# Altium PCB PCB.PcbDoc
Units mil, origin at the board's own origin, x right, y up, seen from the top; angles counter-clockwise.
Board outline 4435 x 2690 mil, 6 copper layers (Top Layer, GND, 5V, 3.3V, Layer 4, Bottom Layer), stack 32.112 mil thick; 43 components, 32 nets, 164 pads, 14 vias.
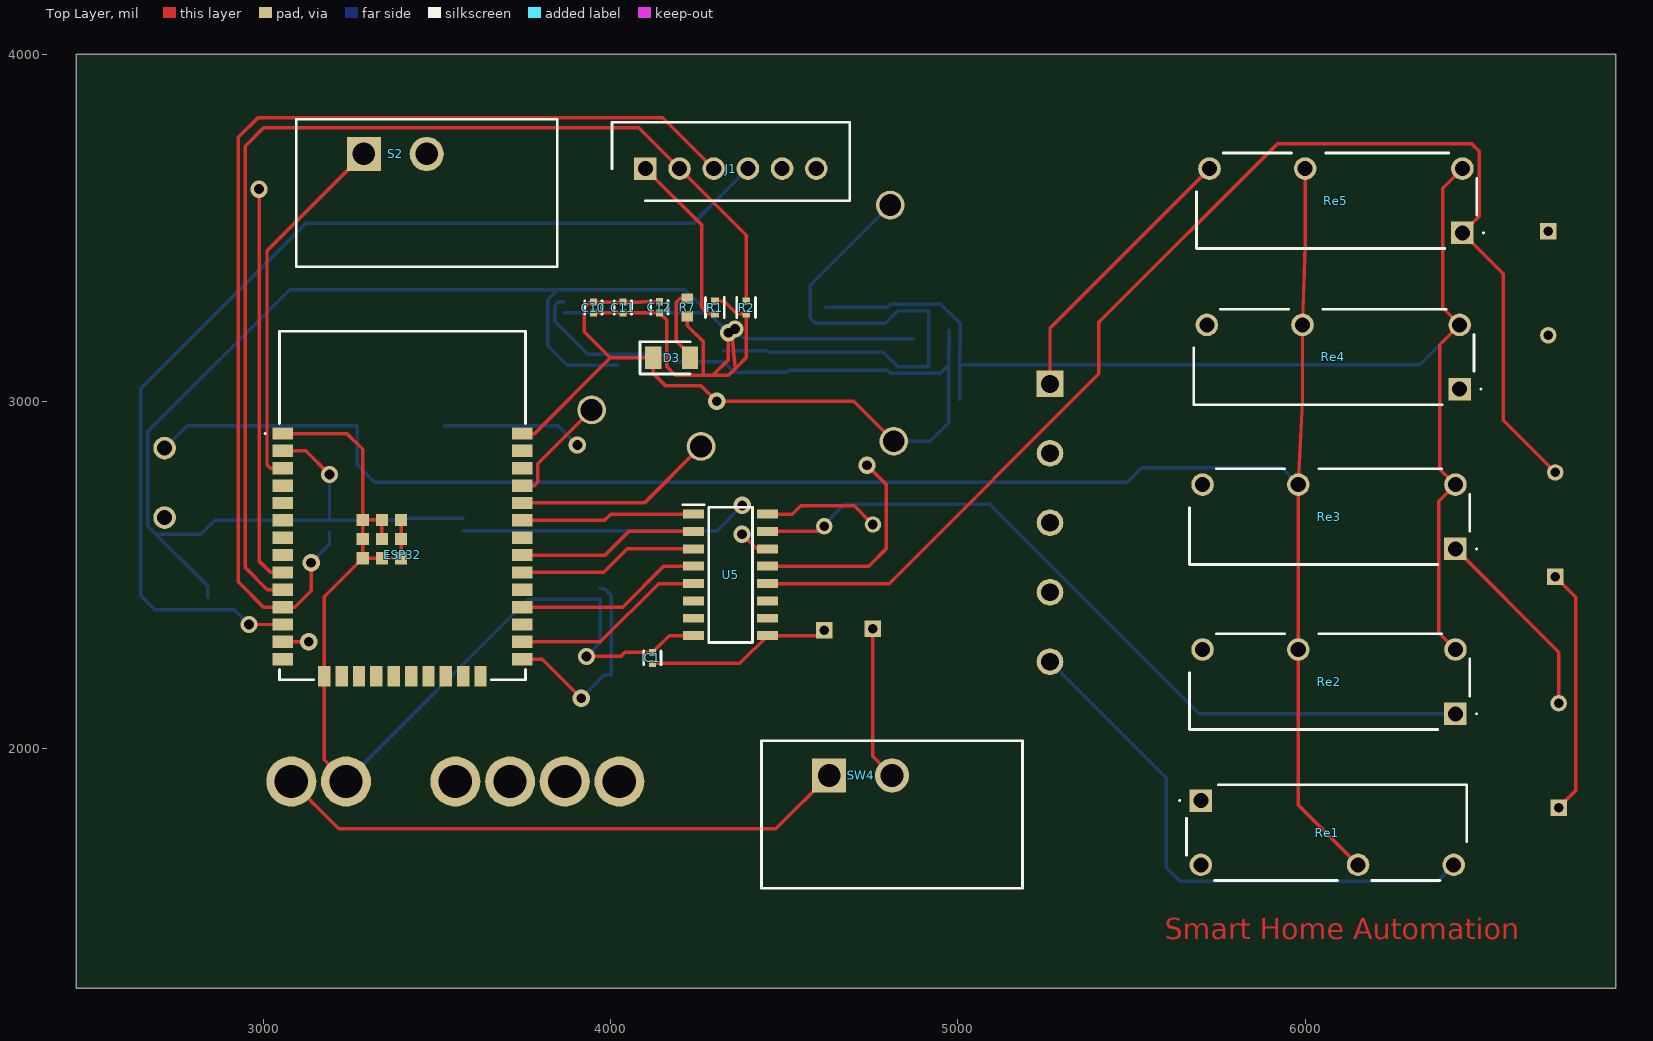
[diagram p0: Top Layer view]
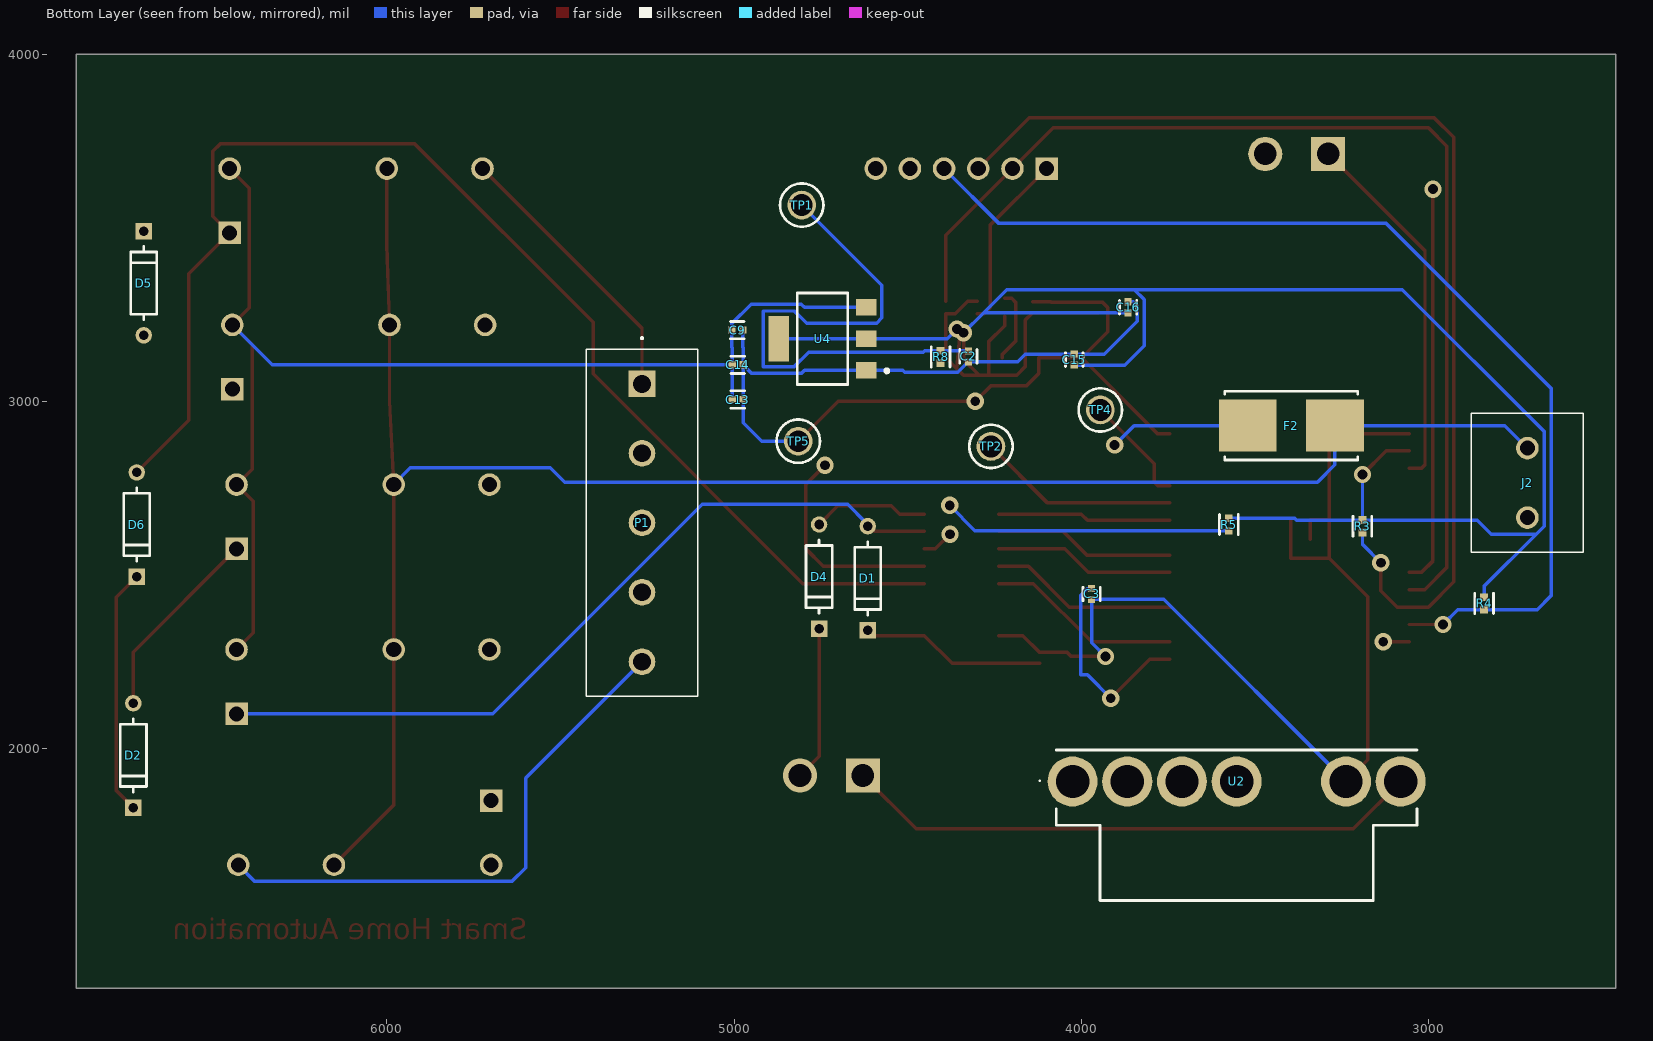
[diagram p1: Bottom Layer view, seen from below]
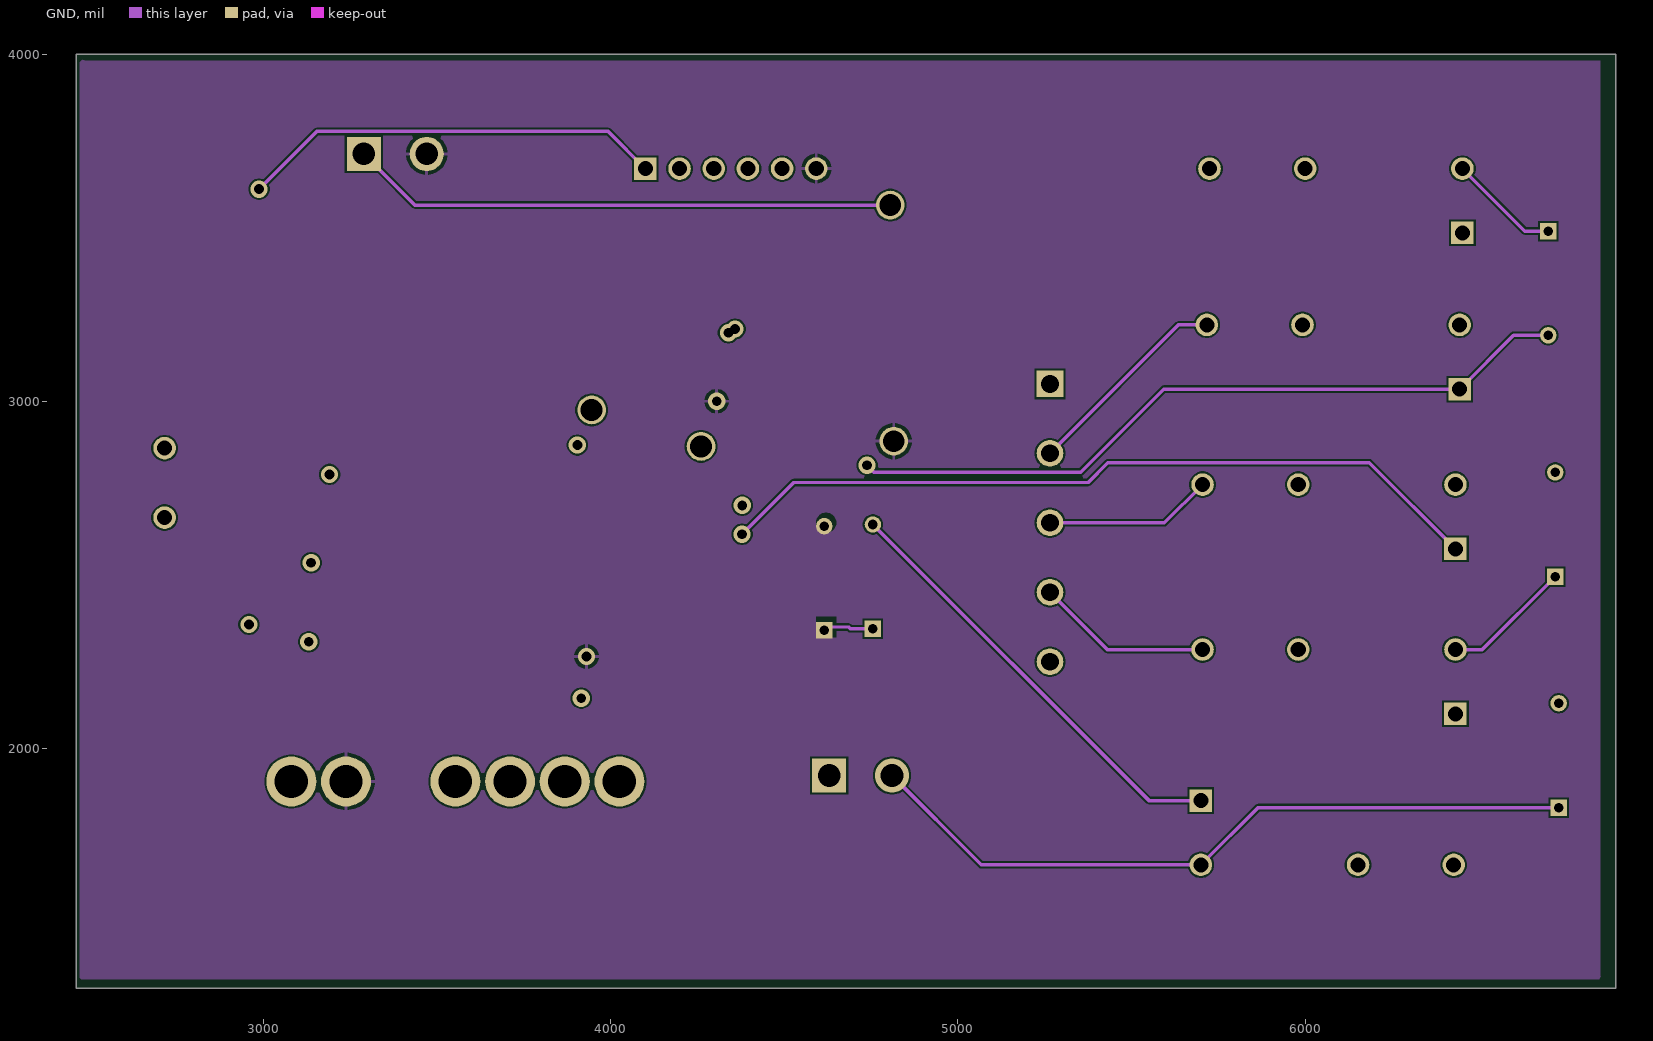
[diagram p2: GND]
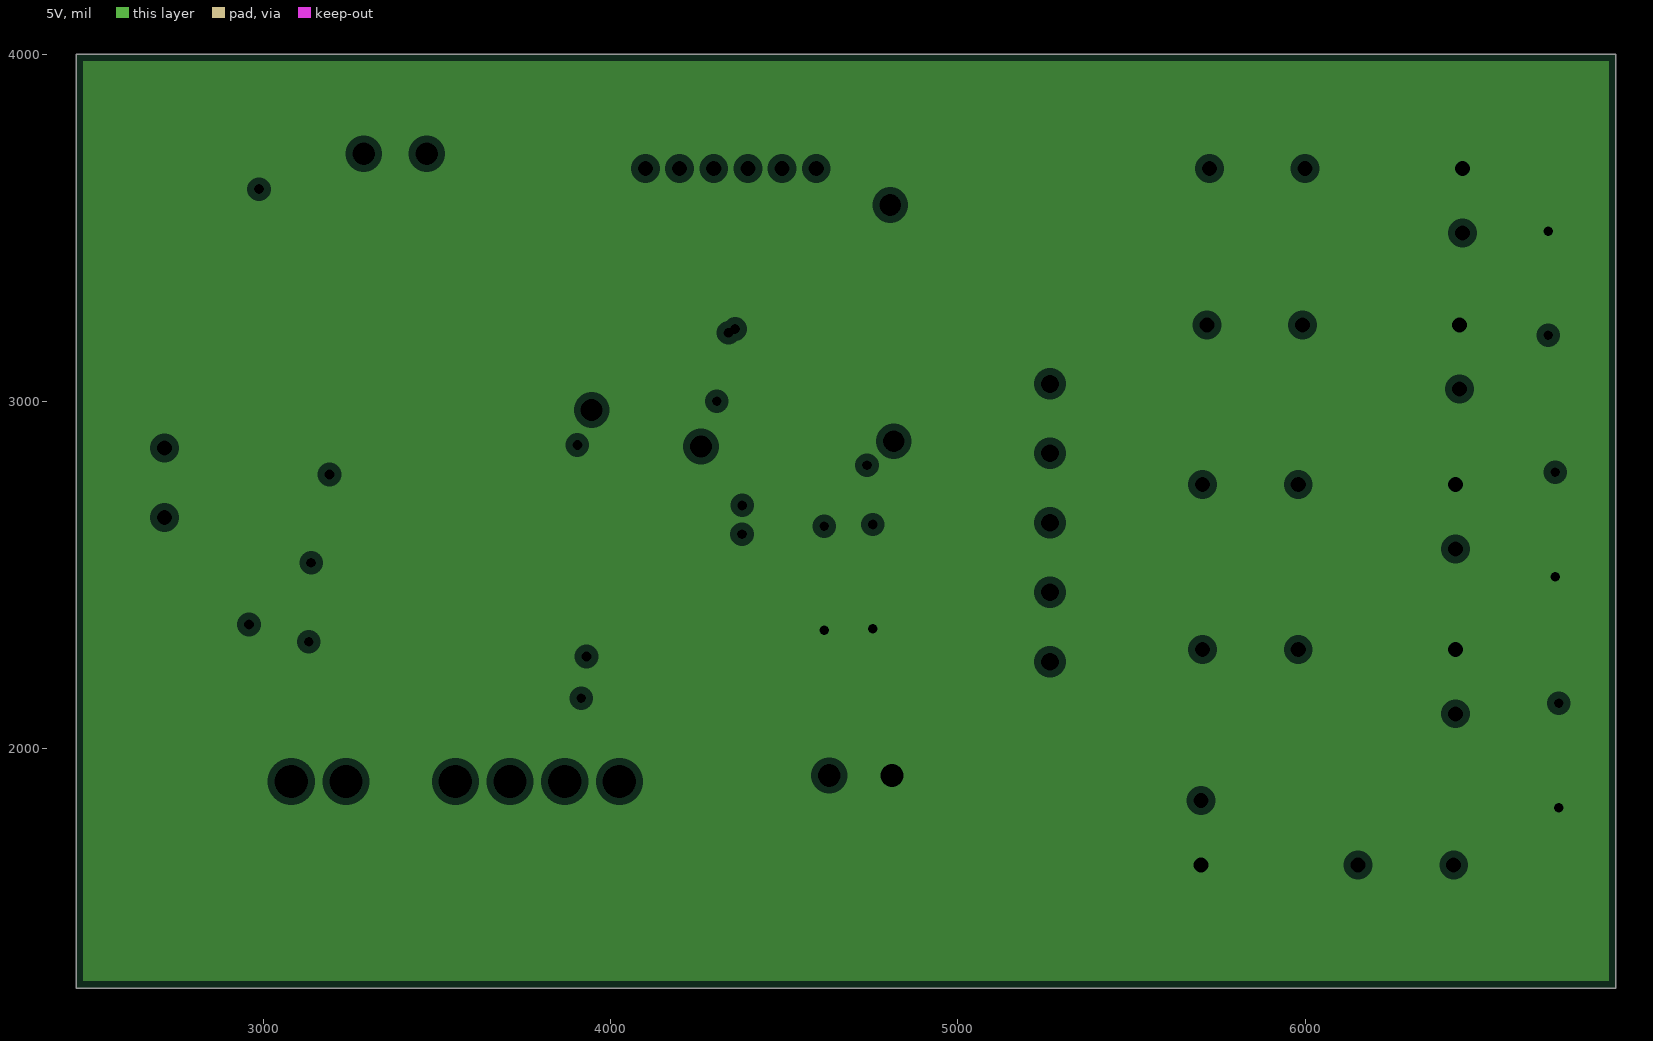
[diagram p3: 5V, clearances drawn from the general rule]
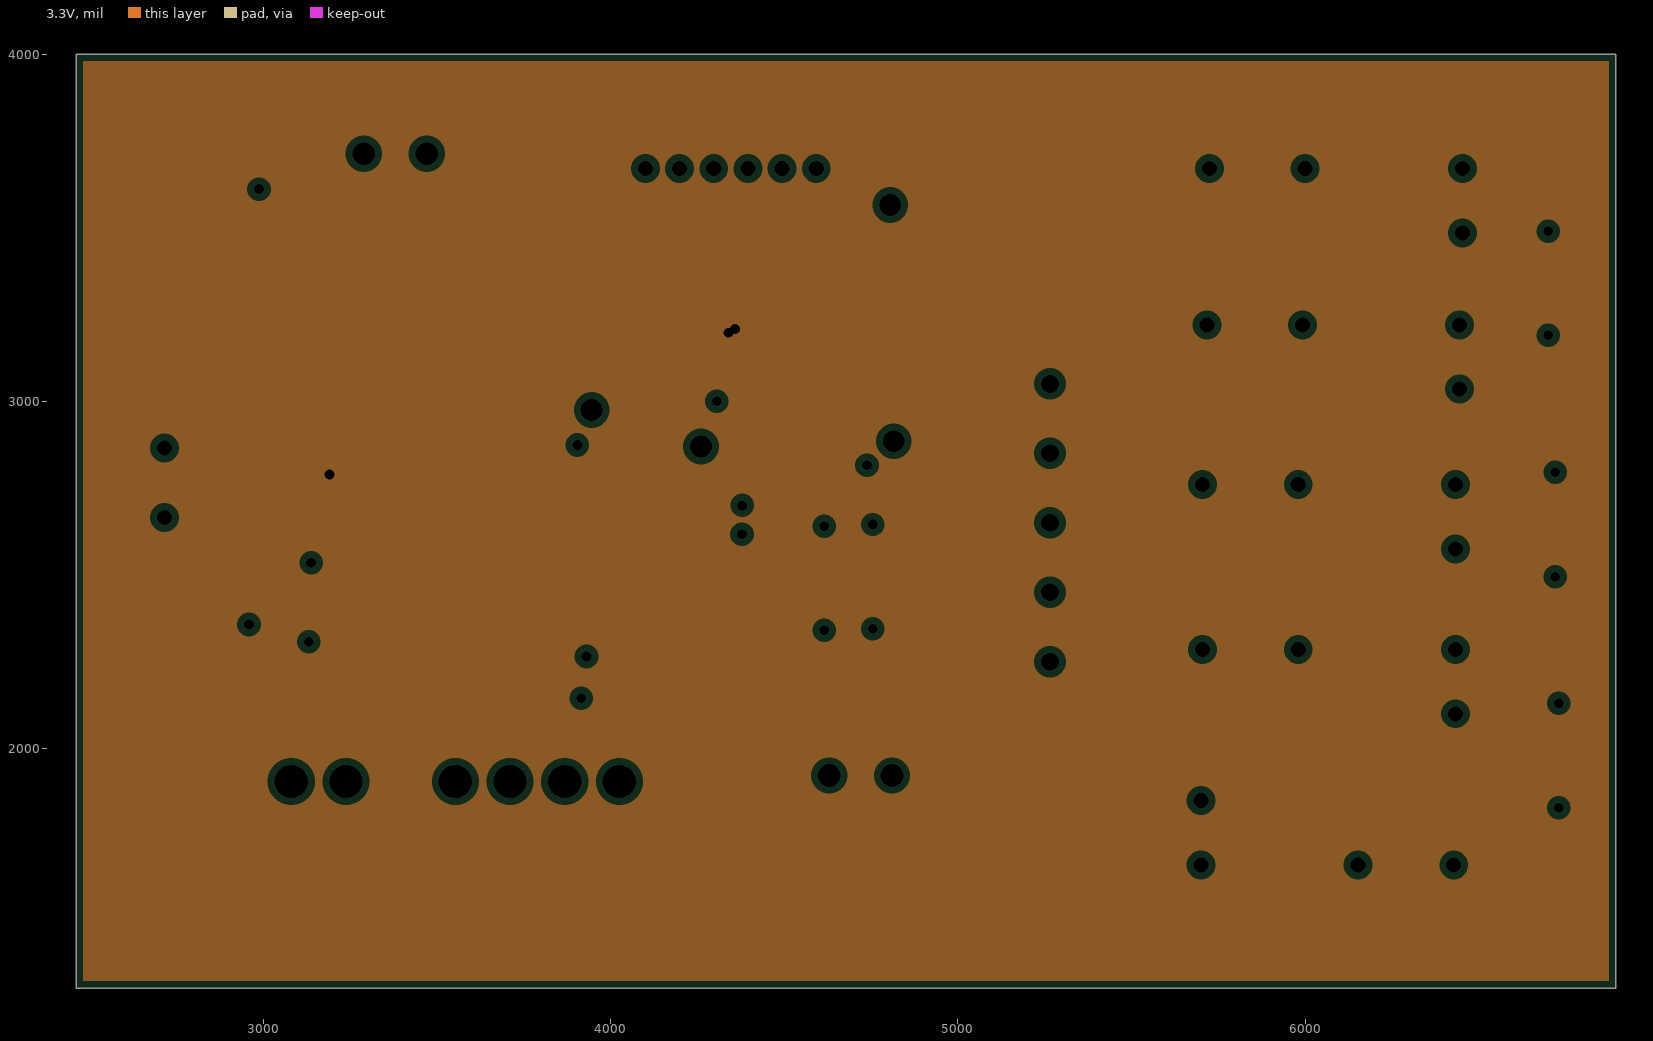
[diagram p4: 3.3V, clearances drawn from the general rule]
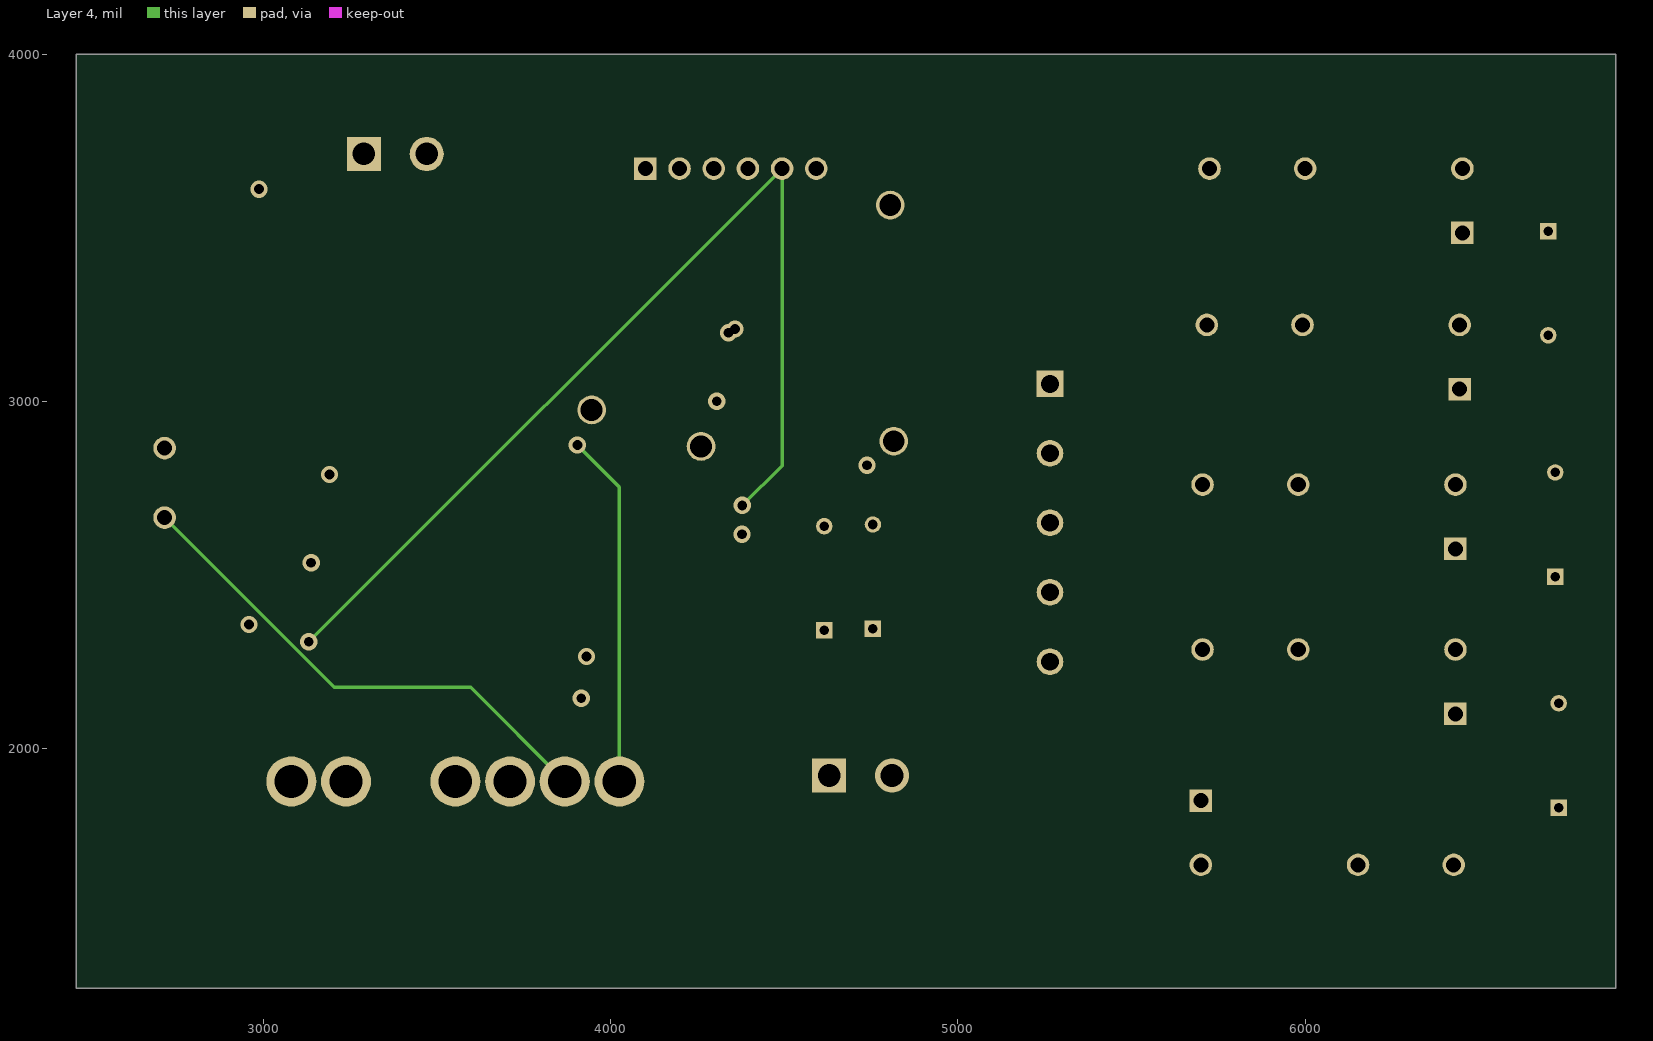
[diagram p5: Layer 4]
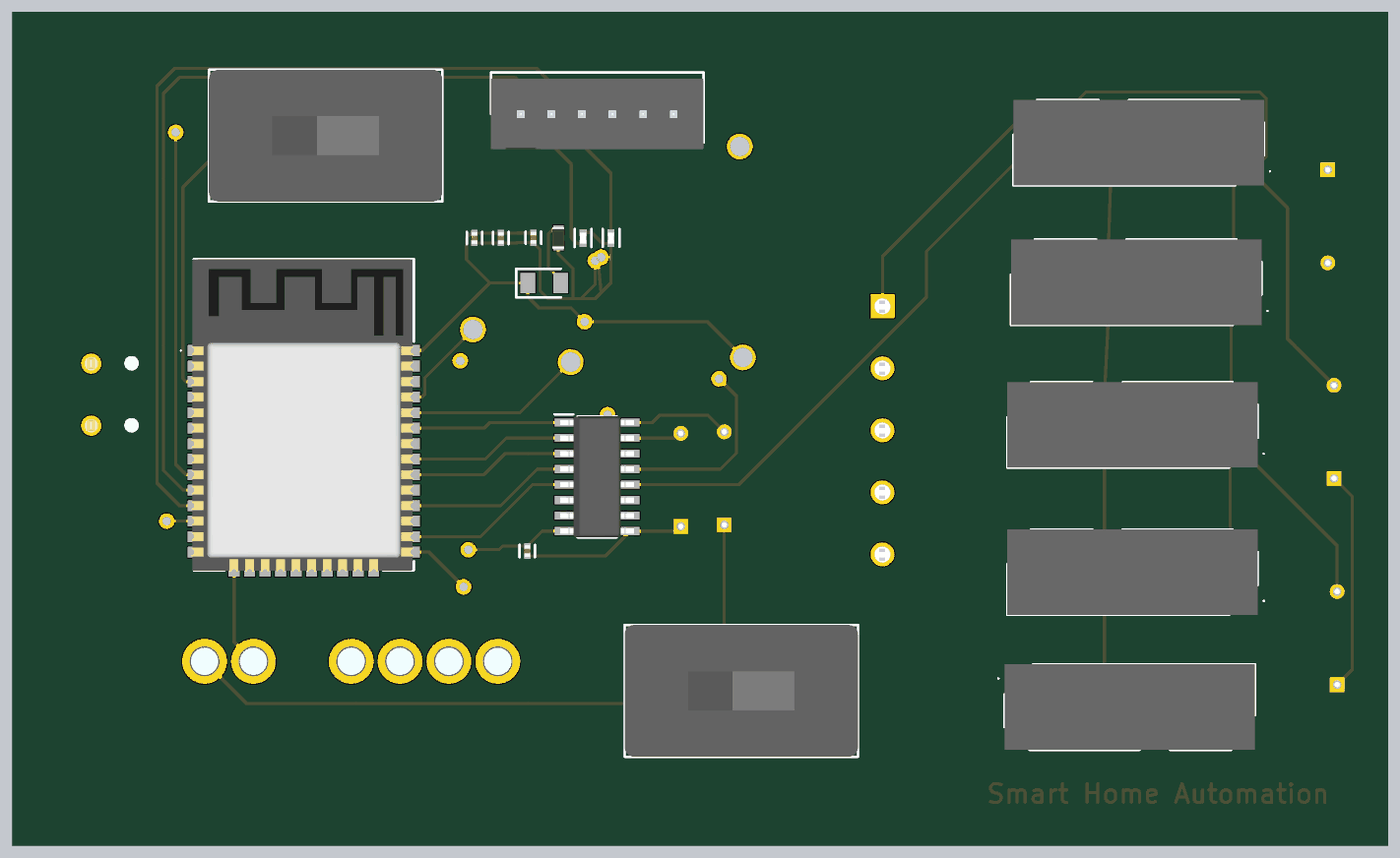
[diagram p6: 3D render of the assembled board from above, using the file's embedded part models]
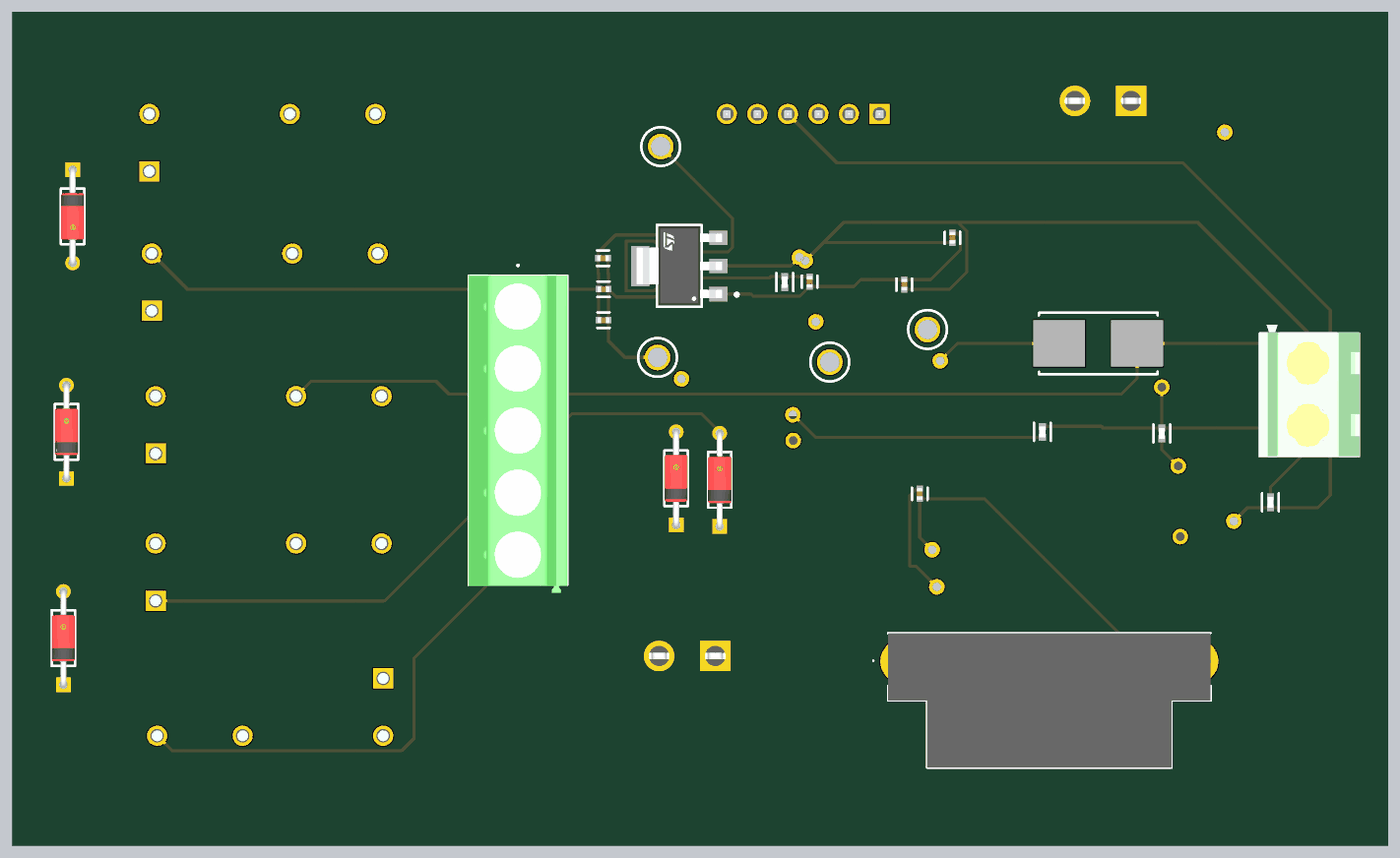
[diagram p7: 3D render of the assembled board from below, using the file's embedded part models]

## Layer stack, top to bottom
Top Solder: solder mask 0.4, Solder Resist, Dk 3.5
Top Layer: signal copper 1.4
Dielectric 4: prepreg 2.8, PP-006, Dk 4.1
GND: signal copper 1.378
Dielectric 2: prepreg 2.8, PP-006, Dk 4.1
5V: plane copper 1.378, net +5V
Dielectric 1: dielectric 12.6, FR-4, Dk 4.8
3.3V: plane copper 1.378, net +3V3
Dielectric 3: prepreg 2.8, PP-006, Dk 4.1
Layer 4: signal copper 1.378
Dielectric 5: prepreg 2.8, PP-006, Dk 4.1
Bottom Layer: signal copper 1.4
Bottom Solder: solder mask 0.4, Solder Resist, Dk 3.5

## Board outline
2460,1310 6895,1310 6895,4000 2460,4000

## Design rules (kind name [scope] priority, off if disabled: settings)
Clearance Clearance_1 [All] p1 off: gap=10 ignorepadtopadclearanceinfootprint=FALSE
Clearance [All] p2 off: gap=5.25 ignorepadtopadclearanceinfootprint=FALSE
HoleToHoleClearance [All] p1 off: gap=10 allowstackedmicrovias=TRUE
MinimumSolderMaskSliver [All] p1 off: minsoldermaskwidth=10
NetAntennae [All] p1 off: netantennaetolerance=0
PlaneClearance [All] p1: clearance=20
PlaneConnect [All] p1: planeconnectstyle=Relief reliefexpansion=20 reliefentries=4 reliefconductorwidth=10 reliefairgap=10
PolygonConnect [All] p1: connectstyle=Relief reliefconductorwidth=10 reliefentries=4 polygonreliefangle="90 Angle" airgapwidth=10
RoutingVias [All] p1: holewidth=28 width=50 viastyle="Through Hole" minholewidth=28 minwidth=50 maxholewidth=28 maxwidth=50
ShortCircuit [All] p1 off: allowed=FALSE
SilkToSolderMaskClearance SilkToSolderMaskClearance_1 [IsPad] p1 off: minsilkscreentomaskgap=10 clearancetoexposedcopper=TRUE
SilkToSolderMaskClearance [IsPad] p2 off: minsilkscreentomaskgap=10 clearancetoexposedcopper=TRUE
SolderMaskExpansion [All] p1: expansion=4 istentingtop=FALSE
SupplyNets "Schematic Supply Nets_2" [InNet('GND')] p1: voltage=0.000
SupplyNets "Schematic Supply Nets_1" [InNet('+3V3')] p2: voltage=0.000
SupplyNets "Schematic Supply Nets" [InNet('+5V')] p3: voltage=0.000
UnRoutedNet [All] p1 off:
UnpouredPolygon [All] p1 off:
Width [All] p1: maxlimit=10 minlimit=10 preferedwidth=10
21 further rules are at their usual default settings.

## Components (designator, comment, footprint, x,y, rotation, side; value= is the part's Value field where it differs from the comment)
C1 "C0402C104K8PACTU" FP-C0402-BB-MFG 4120,2260.75 r90 top value="1 μF"
C2 "C0402C104K8PACTU" FP-C0402-BB-MFG 4325,3129.25 r270 bottom value="0.1 μF"
C3 "C0402C104K8PACTU" FP-C0402-BB-MFG 3970,2445 r270 bottom value="0.1 μF"
C9 "C0402C104K8PACTU" FP-C0402-BB-MFG 4990.75,3205 r180 bottom value="10 μF"
C10 "C0402C104K8PACTU" FP-C0402-BB-MFG 3950,3270 r90 top value="10 μF"
C11 "C0402C104K8PACTU" FP-C0402-BB-MFG 4035,3270 r90 top value="1 μF"
C12 "C0402C104K8PACTU" FP-C0402-BB-MFG 4140,3270.75 r90 top value="0.10 μF"
C13 "C0402C104K8PACTU" FP-C0402-BB-MFG 4989.25,3005 r180 bottom value="1 μF"
C14 "C0402C104K8PACTU" FP-C0402-BB-MFG 4989.25,3105 r180 bottom value="0.10 μF"
C15 "C0402C104K8PACTU" FP-C0402-BB-MFG 4020,3120 r90 bottom value="22 μF"
C16 "C0402C104K8PACTU" FP-C0402-BB-MFG 3865,3270.75 r90 bottom value="0.1 μF"
D1 "1N4148" FP-017AG-MFG 4615,2490.12 r90 bottom
D2 "1N4148" FP-017AG-MFG 6730,1980 r90 bottom
D3 "597-3111-407F" LEDC3015X150N 4175,3125 r0 top
D4 "1N4148" FP-017AG-MFG 4755,2495 r90 bottom
D5 "1N4148" FP-017AG-MFG 6700,3340 r270 bottom
D6 "1N4148" FP-017AG-MFG 6720,2645 r90 bottom
ESP32 "ESP32-WROOM-32E-N4" ESP32WROOM32EN4 3400,2700 r0 top
F2 "0154005.DRT" LFUS-154_V 3395,2930 r0 bottom
J1 "B6B-XH-A_LF__SN_" SHDR6W64P0X250_1X6_1740X575X700P 4099.72,3670 r0 top
J2 "282837-2" 2828372 2715,2665 r90 bottom
P1 "1729157" 1729157 5265,3050 r270 bottom
R1 "CRCW040210K0JNED" FP-CRCW0402-e3-IPC_B 4300,3270 r270 top
R2 "CRCW040210K0JNED" FP-CRCW0402-e3-IPC_B 4390,3270 r90 top
R3 "CRCW040210K0JNED" FP-CRCW0402-e3-IPC_B 3190,2640 r270 bottom
R4 "CRCW040210K0JNED" FP-CRCW0402-e3-IPC_B 2840,2417.8 r270 bottom
R5 "CRCW040210K0JNED" FP-CRCW0402-e3-IPC_B 3575,2645 r270 bottom
R7 "ERJ-3EKF3300V" RESC1608X55X30LL15T15 4220,3270.59 r270 top
R8 "CRCW040210K0JNED" FP-CRCW0402-e3-IPC_B 4405,3127.8 r90 bottom
Re1 "HF46F-G_5-HS1T" HF46FG5HS1T 5699.41,1850.04 r0 top
Re2 "HF46F-G_5-HS1T" HF46FG5HS1T 6432.76,2099.96 r180 top
Re3 "HF46F-G_5-HS1T" HF46FG5HS1T 6432.76,2574.96 r180 top
Re4 "HF46F-G_5-HS1T" HF46FG5HS1T 6445,3035 r180 top
Re5 "HF46F-G_5-HS1T" HF46FG5HS1T 6452.76,3484.96 r180 top
S2 "L101011MS02Q" FP-L101011MS02Q-MFG 3470,3600 r270 top
SW4 "L101011MS02Q" FP-L101011MS02Q-MFG 4810,1810 r270 top
TP1 "TEST" KSTN-5012_V 4805,3565 r180 bottom
TP2 "TEST" KSTN-5012_V 4260,2870 r180 bottom
TP4 "TEST" KSTN-5012_V 3945,2975 r180 bottom
TP5 "TEST" KSTN-5012_V 4815,2885 r180 bottom
U2 "LS05-13B05R3" LS0513B05R3 4024.96,1905 r180 bottom
U4 "LD1117S33CTR" FP-SOT-223-0046067_14-MFG 4745,3180 r0 bottom
U5 "ULN2003LVDR" SOIC127P600X175-16N 4345,2500 r0 top

## Footprints (in the part's own frame and the unit in brackets; to place one, negate y for a bottom-side part, rotate by r counter-clockwise, add the part's x,y. Pads: shape width x height; smd on the part's side, far side on the other; paste and mask are expansions set on the pad)
1729157 [mm]
  rect 1.95x1.95 hole 1.3: 1(0,0)
  round 1.95 hole 1.3: 2(5.08,0) 3(10.16,0) 4(15.24,0) 5(20.32,0)
  silkscreen extent -3.4,-4.08 22.86,4.08, body extent -2.51,-4.03 23.46,4.07, height 10.52
2828372 [mm]
  round 1.65 hole 1.1: 1(0,0) 2(5.08,0)
  silkscreen extent -2.54,-4.1 7.62,4.1, body extent -2.51,-4.11 8.25,4.09, height 9.84
ESP32WROOM32EN4 [mm]
  rect 1.5x0.9 smd: 1(-8.75,5.26) 2(-8.75,3.99) 3(-8.75,2.72) 4(-8.75,1.45) 5(-8.75,0.18) 6(-8.75,-1.09) 7(-8.75,-2.36) 8(-8.75,-3.63) 9(-8.75,-4.9) 10(-8.75,-6.17) 11(-8.75,-7.44) 12(-8.75,-8.71) 13(-8.75,-9.98) 14(-8.75,-11.25) 25(8.75,-11.25) 26(8.75,-9.98) 27(8.75,-8.71) 28(8.75,-7.44) 29(8.75,-6.17) 30(8.75,-4.9) 31(8.75,-3.63) 32(8.75,-2.36) 33(8.75,-1.09) 34(8.75,0.18) 35(8.75,1.45) 36(8.75,2.72) 37(8.75,3.99) 38(8.75,5.26)
  rect 0.9x1.5 smd: 15(-5.715,-12.5) 16(-4.445,-12.5) 17(-3.175,-12.5) 18(-1.905,-12.5) 19(-0.635,-12.5) 20(0.635,-12.5) 21(1.905,-12.5) 22(3.175,-12.5) 23(4.445,-12.5) 24(5.715,-12.5)
  rect 0.9x0.9 smd: 39(-2.9,-1.06) 40(-2.9,-2.46) 41(-2.9,-3.86) 42(-1.5,-3.86) 43(-0.1,-3.86) 44(-0.1,-2.46) 45(-0.1,-1.06) 46(-1.5,-1.06) 47(-1.5,-2.46)
  silkscreen extent -10.1,-12.75 9,12.75, body extent -9.21,-12.84 8.98,12.75, height 3.2
FP-017AG-MFG [mm]
  rect 1.2x1.2 hole 0.7 paste-2539.97 mask+0: 1(-3.813,0)
  round 1.2 hole 0.7 paste-2539.97 mask+0: 2(3.813,0)
  silkscreen extent -2.68,-0.95 2.68,0.95, body extent -4.06,-0.95 4.06,0.95, height 1.91
FP-C0402-BB-MFG [mm]
  rect 0.52x0.52 smd paste+0 mask+0: 1(-0.4,0) 2(0.4,0)
  silkscreen extent -0.5,-0.64 0.5,0.64, body extent -0.5,-0.25 0.5,0.25, height 0.55
FP-CRCW0402-e3-IPC_B [mil]
  rect 22.37x22.54 smd paste+0 mask+0: 1(-17.8,0) 2(17.8,0)
  silkscreen extent -29,-27 29,27, body extent -35,-17 35,17, height 10
FP-L101011MS02Q-MFG [mm]
  rect 2.5x2.5 hole 1.65 paste-2539.97 mask+0: 1(-2.85,-4.6)
  round 2.5 hole 1.65 paste-2539.97 mask+0: 2(-2.85,0)
  silkscreen extent -5.39,-9.55 5.4,9.55, body extent -5.4,-9.55 5.4,9.55, height 14.17
FP-SOT-223-0046067_14-MFG [mm]
  rect 1.5x1.2 smd paste+0 mask+0: 1(-3.2,2.3) 2(-3.2,0) 3(-3.2,-2.3)
  rect 1.5x3.3 smd paste+0 mask+0: 4(3.2,0)
  silkscreen extent -4.82,-3.35 1.85,3.35, body extent -3.5,-3.25 3.5,3.25, height 1.9
HF46FG5HS1T [mm]
  rect 1.65x1.65 hole 1.1: 1(0,0)
  round 1.65 hole 1.1: 2(0,-4.7) 3(11.5,-4.7) 4(18.5,-4.7)
  silkscreen extent -1.6,-5.85 19.45,1.15, body extent -1.05,-5.85 19.45,1.15, height 15.7
KSTN-5012_V [mm] "Test Point, Dia 3.17mm"
  round 2.1 hole 1.6: 1(0,0)
  silkscreen extent -1.59,-1.58 1.59,1.58, body extent -1.58,-1.59 1.58,1.59, height 8.12
LEDC3015X150N [mm]
  rect 1.2x1.65 smd: 1(-1.35,0) 2(1.35,0)
  silkscreen extent -2.3,-1.18 1.35,1.18
LFUS-154_V [mm] "SMD, 2-Leads, Body 9.73x5.03mm"
  rect 4.24x3.81 smd: 1(-3.185,0) 2(3.185,0)
  silkscreen extent -4.87,-2.52 4.87,2.51, body extent -4.86,-2.51 4.86,2.51, height 3.81
LS0513B05R3 [mm]
  round 3.66 hole 2.44: 1(0,0) 2(4,0) 3(8,0) 4(12,0) 5(20,0) 6(24,0)
  silkscreen extent -2.45,-8.7 25.2,2.3, body extent -1.2,-8.7 25.2,2.3, height 15.83
RESC1608X55X30LL15T15 [mm] "Chip Resistor, 2-Leads, Body 1.75x0.95mm, IPC High Density"
  rect 0.75x0.85 smd: 1(-0.65,0) 2(0.65,0)
  body extent -0.87,-0.48 0.87,0.48, height 0.55
SHDR6W64P0X250_1X6_1740X575X700P [mm]
  rect 1.65x1.65 hole 1.1: 1(0,0)
  round 1.65 hole 1.1: 2(2.5,0) 3(5,0) 4(7.5,0) 5(10,0) 6(12.5,0)
  silkscreen extent -2.45,-2.35 14.95,3.4, body extent -2.45,-2.88 14.95,2.88, height 7
SOIC127P600X175-16N [mm]
  rect 1.525x0.65 smd: 1(-2.712,4.445) 2(-2.712,3.175) 3(-2.712,1.905) 4(-2.712,0.635) 5(-2.712,-0.635) 6(-2.712,-1.905) 7(-2.712,-3.175) 8(-2.712,-4.445) 9(2.712,-4.445) 10(2.712,-3.175) 11(2.712,-1.905) 12(2.712,-0.635) 13(2.712,0.635) 14(2.712,1.905) 15(2.712,3.175) 16(2.712,4.445)
  silkscreen extent -3.47,-4.95 1.6,5.12, body extent -3.01,-4.95 3.01,4.95, height 1.75

## Part data
C1 C13: library part CMP-2008-02046-2, "CAP CER 0.1UF 10V X5R 0402", Capacitance=1uF, Manufacturer=Kemet, Package=C0402-BB, Temperature="-55°C to +125°C", Temperature Characteristic=X5R, Temperature Coefficient=15%, Temperature Range High=+125°C, Temperature Range Low=-55°C, Tolerance=0.1, Voltage Rating="10 V", Automotive=No, Category=Cap, ComponentLink2Description=Datasheet, ComponentLink2URL=https://content.kemet.com/datasheets/KEM_C1002_X7R_SMD.pdf, Device Class L1="Passive Components", Device Class L2=Capacitors, Device Class L3="Ceramic Capacitors", Digikey Description="CAP CER 0.1UF 10V X5R 0402", Height=0.55mm, Ipc Land Pattern Name=CAPC10050X50, Lead Free=Yes, Manufacturer Part Number=C0402C104K8PACTU, Material=Ceramic, Mouser Description="Capacitor 100 nF 10 VDC 0402", Octopart=https://octopart.com/c0402c104k8pactu-kemet-140039, RoHS=TRUE
C2 C3 C16: library part CMP-2008-02046-2, "CAP CER 0.1UF 10V X5R 0402", Capacitance="0.1 μF", Manufacturer=Kemet, Package=C0402-BB, Temperature="-55°C to +125°C", Temperature Characteristic=X5R, Temperature Coefficient=15%, Temperature Range High=+125°C, Temperature Range Low=-55°C, Tolerance=0.1, Voltage Rating="10 V", Automotive=No, Category=Cap, ComponentLink2Description=Datasheet, ComponentLink2URL=https://content.kemet.com/datasheets/KEM_C1002_X7R_SMD.pdf, Device Class L1="Passive Components", Device Class L2=Capacitors, Device Class L3="Ceramic Capacitors", Digikey Description="CAP CER 0.1UF 10V X5R 0402", Height=0.55mm, Ipc Land Pattern Name=CAPC10050X50, Lead Free=Yes, Manufacturer Part Number=C0402C104K8PACTU, Material=Ceramic, Mouser Description="Capacitor 100 nF 10 VDC 0402", Octopart=https://octopart.com/c0402c104k8pactu-kemet-140039, RoHS=TRUE
C9 C10: library part CMP-2008-02046-2, "CAP CER 0.1UF 10V X5R 0402", Capacitance="10 μF", Manufacturer=Kemet, Package=C0402-BB, Temperature="-55°C to +125°C", Temperature Characteristic=X5R, Temperature Coefficient=15%, Temperature Range High=+125°C, Temperature Range Low=-55°C, Tolerance=0.1, Voltage Rating="10 V", Automotive=No, Category=Cap, ComponentLink2Description=Datasheet, ComponentLink2URL=https://content.kemet.com/datasheets/KEM_C1002_X7R_SMD.pdf, Device Class L1="Passive Components", Device Class L2=Capacitors, Device Class L3="Ceramic Capacitors", Digikey Description="CAP CER 0.1UF 10V X5R 0402", Height=0.55mm, Ipc Land Pattern Name=CAPC10050X50, Lead Free=Yes, Manufacturer Part Number=C0402C104K8PACTU, Material=Ceramic, Mouser Description="Capacitor 100 nF 10 VDC 0402", Octopart=https://octopart.com/c0402c104k8pactu-kemet-140039, RoHS=TRUE
C11: library part CMP-2008-02046-2, "CAP CER 0.1UF 10V X5R 0402", Capacitance="1 μF", Manufacturer=Kemet, Package=C0402-BB, Temperature="-55°C to +125°C", Temperature Characteristic=X5R, Temperature Coefficient=15%, Temperature Range High=+125°C, Temperature Range Low=-55°C, Tolerance=0.1, Voltage Rating="10 V", Automotive=No, Category=Cap, ComponentLink2Description=Datasheet, ComponentLink2URL=https://content.kemet.com/datasheets/KEM_C1002_X7R_SMD.pdf, Device Class L1="Passive Components", Device Class L2=Capacitors, Device Class L3="Ceramic Capacitors", Digikey Description="CAP CER 0.1UF 10V X5R 0402", Height=0.55mm, Ipc Land Pattern Name=CAPC10050X50, Lead Free=Yes, Manufacturer Part Number=C0402C104K8PACTU, Material=Ceramic, Mouser Description="Capacitor 100 nF 10 VDC 0402", Octopart=https://octopart.com/c0402c104k8pactu-kemet-140039, RoHS=TRUE
C12 C14: library part CMP-2008-02046-2, "CAP CER 0.1UF 10V X5R 0402", Capacitance="0.10 μF", Manufacturer=Kemet, Package=C0402-BB, Temperature="-55°C to +125°C", Temperature Characteristic=X5R, Temperature Coefficient=15%, Temperature Range High=+125°C, Temperature Range Low=-55°C, Tolerance=0.1, Voltage Rating="10 V", Automotive=No, Category=Cap, ComponentLink2Description=Datasheet, ComponentLink2URL=https://content.kemet.com/datasheets/KEM_C1002_X7R_SMD.pdf, Device Class L1="Passive Components", Device Class L2=Capacitors, Device Class L3="Ceramic Capacitors", Digikey Description="CAP CER 0.1UF 10V X5R 0402", Height=0.55mm, Ipc Land Pattern Name=CAPC10050X50, Lead Free=Yes, Manufacturer Part Number=C0402C104K8PACTU, Material=Ceramic, Mouser Description="Capacitor 100 nF 10 VDC 0402", Octopart=https://octopart.com/c0402c104k8pactu-kemet-140039, RoHS=TRUE
C15: library part CMP-2008-02046-2, "CAP CER 0.1UF 10V X5R 0402", Capacitance="22 μF", Manufacturer=Kemet, Package=C0402-BB, Temperature="-55°C to +125°C", Temperature Characteristic=X5R, Temperature Coefficient=15%, Temperature Range High=+125°C, Temperature Range Low=-55°C, Tolerance=0.1, Voltage Rating="10 V", Automotive=No, Category=Cap, ComponentLink2Description=Datasheet, ComponentLink2URL=https://content.kemet.com/datasheets/KEM_C1002_X7R_SMD.pdf, Device Class L1="Passive Components", Device Class L2=Capacitors, Device Class L3="Ceramic Capacitors", Digikey Description="CAP CER 0.1UF 10V X5R 0402", Height=0.55mm, Ipc Land Pattern Name=CAPC10050X50, Lead Free=Yes, Manufacturer Part Number=C0402C104K8PACTU, Material=Ceramic, Mouser Description="Capacitor 100 nF 10 VDC 0402", Octopart=https://octopart.com/c0402c104k8pactu-kemet-140039, RoHS=TRUE
D1 D2 D4 D5 D6: library part CMP-07163-000046-1, "DIODE GEN PURP 100V 200MA DO35", Average Rectified Current=200mA, Capacitance=4pF, Case/Package=DO-35, Current=4A, Forward Current=300mA, Forward Voltage=1V, Max Forward Surge Current (Ifsm)=1A, Max Operating Temperature=175°C, Max Power Dissipation=500mW, Max Repetitive Reverse Voltage (Vrrm)=100V, Max Reverse Current=5uA, Min Operating Temperature=-65°C, Package Quantity=2000, Contact Plating=Tin, Current Rating=200mA, Diameter=1.91mm, Element Configuration=Single, Height=4.56mm, Lead Free="Lead Free", Length=4.56mm, Max Reverse Voltage (DC)=100V, Max Surge Current=4A, Mount="Through Hole", Number of Pins=2, Output Current=200mA, Outside Diameter=1.85mm, Packaging=Bulk, Peak Non-Repetitive Surge Current=4A, Polarity=Standard, Power Dissipation=500mW, Radiation Hardening=No, REACH SVHC="No SVHC", Recovery Time=4ns, Reverse Recovery Time=4ns, Reverse Voltage=100V, Series=-, Voltage=100V, Voltage Rating (DC)=100V, Weight=0.01lb, Width=1.91mm
D3: "LED", Manufacturer_Name=Dialight, Mouser Part Number=645-597-3111-407F, Arrow Part Number=597-3111-407F, Arrow Price/Stock=https://www.arrow.com/en/products/597-3111-407f/dialight?utm_currency=USD&region=nac, Datasheet Link=https://datasheet.datasheetarchive.com/originals/distributors/Datasheets-DGA13/1153722.pdf, Height=1.5mm, Manufacturer_Part_Number=597-3111-407F, Mouser Price/Stock=https://www.mouser.co.uk/ProductDetail/Dialight/597-3111-407F?qs=DVhSRDYZfLqO0KXLkTIRsA%3D%3D
ESP32: "Integrated Circuit", Manufacturer_Name="Espressif Systems", Mouser Part Number=356-ESP32WRM32E132PH, Datasheet Link=https://www.espressif.com/sites/default/files/documentation/esp32-wroom-32e_esp32-wroom-32ue_datasheet_en.pdf, Height=3.25mm, Manufacturer_Part_Number=ESP32-WROOM-32E-N4, Mouser Price/Stock=https://www.mouser.co.uk/ProductDetail/Espressif-Systems/ESP32-WROOM-32E-N4?qs=Li%252BoUPsLEnsPzTWsi%252BRMgQ%3D%3D
F2: library part CMP-2000-07571-1, "Fuse and Holder Combination, 125 V, 5 A, -55 to 125 degC, 2-Pin SMD, RoHS, Tape and Reel", Case\/Package=SMD/SMT, Colour=White, Current Rating=5A, DC Cold Resistance=13.6mOhm, Flammability Rating=UL94V-0, Manufacturer=Littelfuse, Max Operating Temperature=125degC, Min Operating Temperature=-55degC, Package Description="2-Pin Surface Mount Device, Body 9.73 x 5.03 mm", Package Quantity=1500, Package Reference=154, Power Dissipation=125W, Voltage Rating=125V, Approvals=PSE, Body Material=Thermoplastic, Datasheet URL=http://www.littelfuse.com/~/media/electronics/datasheets/fuses/littelfuse_fuse_154_154t_154l_154tl_datasheet.pdf.pdf, Datasheet Version=06/2017, Depth=5.03mm, Fuse Current=5A, Fuse Type=BoardMount(CartridgeStyleExcluded), Height=3.81mm, Lead Free=LeadFree, Length=9.73mm, Manufacturer URL=http://www.littelfuse.com/, Mount=Holder, Mounting Technology=SurfaceMount, Number of Pins=2, Packaging=TapeandReel, Radiation Hardening=No, REACH SVHC=Unknown, RoHSCompliant=True, Terminal Material=Copper, Termination=SMD/SMT, Voltage Rating (AC)=125V, Voltage Rating (DC)=125V, Width=5.03mm, Working Voltage=125V
J1: "Connector", Arrow Part Number=B6B-XH-A(LF)(SN), Manufacturer_Name="JST (JAPAN SOLDERLESS TERMINALS)", Mouser Part Number=306-B6BXHALFSN, Arrow Price/Stock=https://www.arrow.com/en/products/b6b-xh-a-lf-sn/jst-manufacturing?utm_currency=USD&region=europe, Datasheet Link=https://datasheet.lcsc.com/szlcsc/JST-Sales-America-B6B-XH-A-LF-SN_C144397.pdf, Height=7mm, Manufacturer_Part_Number=B6B-XH-A(LF)(SN), Mouser Price/Stock=https://www.mouser.co.uk/ProductDetail/JST-Commercial/B6B-XH-ALFSN?qs=cdbOS8ANM9AKmMmofXbwlw%3D%3D
J2: "Connector", Manufacturer_Name="TE Connectivity", Mouser Part Number=571-2828372, Arrow Part Number=282837-2, Arrow Price/Stock=https://www.arrow.com/en/products/282837-2/te-connectivity?utm_currency=USD&region=europe, Datasheet Link=https://www.te.com/commerce/DocumentDelivery/DDEController?Action=srchrtrv&DocNm=1-1773458-1_EURO_STYLE_QRG&DocType=Data%20Sheet&DocLang=English&PartCntxt=282837-2&DocFormat=pdf, Height=10.3mm, Manufacturer_Part_Number=282837-2, Mouser Price/Stock=https://www.mouser.co.uk/ProductDetail/TE-Connectivity/282837-2?qs=A%252Bip%252BNCYi6O2H0NGWOeAxg%3D%3D
P1: "Connector", Manufacturer_Name="Phoenix Contact", Mouser Part Number=651-1729157, Arrow Part Number=1729157, Arrow Price/Stock=https://www.arrow.com/en/products/1729157/phoenix-contact?region=nac, Datasheet Link=http://www.phoenixcontact.com/de/produkte/1729157/pdf, Height=10.15mm, Manufacturer_Part_Number=1729157, Mouser Price/Stock=https://www.mouser.co.uk/ProductDetail/Phoenix-Contact/1729157?qs=GFUSqQMLmmm7NDLceAVXHA%3D%3D
R1 R2 R3 R4 R5 R8: library part CMP-2002-08136-3, "RES Thick Film, 10kΩ, 5%, 0.063W, 200ppm/°C, 0402", Case Code (Imperial)=0402, Case Code (Metric)=1005, Max Operating Temperature=155°C, Max Power Dissipation=63mW, Min Operating Temperature=-55°C, Package Quantity=1, Resistance=10kR, Temperature Coefficient=200ppm/°C, Tolerance=5%, Voltage Rating=50V, Case/Package=0402, Composition="Thick Film", Contact Plating=Tin, Depth=0.5mm, Features="Automotive AEC-Q200", Height=0.016inch, Length=1mm, Military Standard=Not, Mount="Surface Mount", Number of Terminations=2, Packaging="Tape and Reel", Power Rating=63mW, Radiation Hardening=No, Termination=SMD/SMT, Weight=2.3E-05oz, Width=0.5mm
R7: library part CMP-2000-00435-2, "Chip Resistor, 330 Ohm, +/- 1%, 0.1 W, -55 to 155 degC, 0603 (1608 Metric), RoHS, Tape and Reel", Current Rating="500 mA", Max Operating Temperature="85 degC", Min Operating Temperature="-25 degC", Package Quantity=1500, Voltage Rating="10 V", ComponentLink1Description="Manufacturer URL", ComponentLink1URL=http://www.panasonic.com/, ComponentLink2Description=Datasheet, ComponentLink2URL=http://industrial.panasonic.com/cdbs/www-data/pdf/RDA0000/AOA0000C86.pdf, Contact Finish=Gold, Contact Material=Copper, Contact Plating=Gold, DatasheetVersion=Apr-15, Gender=Male, Height="1.45 mm", Lead Pitch="1.1 mm", Length="13.7 mm", Mating Cycles=10000, Mount="Surface Mount", PackageDescription="2-Pin Surface Mount Device, Body 1.6 x 0.85 mm", PackageReference=0603, Packaging="Tape and Reel", Pins=8, REACH SVHC="No SVHC", RoHSCompliant=true, Width="1.45 mm"
Re1 Re2 Re3 Re4 Re5: "Relay or Contactor", Manufacturer_Name=Hongfa, Manufacturer_Part_Number=HF46F-G/5-HS1T, Datasheet Link=https://source.hongfa.com//Api/DownloadPdf/434, Height=15.6mm
S2 SW4: library part CMP-10038-000020-1, "SWITCH SLIDE SPST 4A 125V", Actuator Color=Black, Contact Current Rating=2A, Current Rating=4A, Max Operating Temperature=65°C, Max Voltage Rating (AC)=250V, Max Voltage Rating (DC)=125V, Min Operating Temperature=-30°C, Package Quantity=1, Voltage Rating (DC)=28V, Actuator Length=5.08mm, Actuator Material=Nylon, Actuator Type=Standard, Contact Material=Copper, Contact Plating=Silver, Depth=10.8mm, Electrical Life=10000Cycles, Housing Material=Nylon, Lead Free="Lead Free", Length=19.1mm, Max Current Rating=4A, Mount="Through Hole", Orientation=Straight, Packaging=Bulk, Radiation Hardening=No, RoHS Compliant=Yes, Series=L, Switch Function=On-Off, Switch Travel=3.81mm, Termination="PC Pins", Throw Configuration=SPST, Voltage Rating (AC)=125V
TP1 TP2 TP4 TP5: library part CMP-1672-00004-4, "Test Point, White, Through Hole, RoHS, Bulk", Colour=White, Manufacturer=Keystone, Package Quantity=100, ComponentLink1Description="Manufacturer URL", ComponentLink1URL=http://www.keyelco.com/, ComponentLink2Description=Datasheet, ComponentLink2URL=http://www.keyelco.com/product-pdf.cfm?p=1321, Contact Material=Bronze, Contact Plating=Silver, DatasheetVersion="Rev. F, 12/2013", Height="8.12 mm", Length="11.3 mm", Mount="Through Hole", Mounting Technology="Through Hole", PackageDescription="1-Pin Through Hole Device, Dia 3.17 mm", PackageReference=5012, Packaging=Bulk, Pins=1, REACH SVHC="No SVHC", RoHSCompliant=true
U2: "Power Supply", Manufacturer_Name=Morunsun, Datasheet Link=https://www.mornsun-power.com/html/pdf/LS05-13B05R3.html, Height=15.73mm, Manufacturer_Part_Number=LS05-13B05R3
U4: library part CMP-0244-00307-2, "IC REG LINEAR 3.3V 800MA SOT223", Case/Package=SOT-223, Dropout Voltage=1.1V, Input Bias Current=5mA, Max Input Voltage=15V, Max Operating Temperature=125°C, Max Output Current=1.3A, Max Output Voltage=3.3V, Max Power Dissipation=12W, Min Input Voltage=5.3V, Min Operating Temperature=-40°C, Output Current=950mA, Output Voltage Accuracy=1%, Package Quantity=1, Quiescent Current=10mA, Accuracy=1%, Contact Plating=Tin, Height=1.8mm, Lead Free="Lead Free", Length=6.5mm, Max Supply Voltage=15V, Min Output Voltage=3.3V, Min Supply Voltage=3.3V, Mount="Surface Mount", Nominal Output Voltage=3.3V, Number of Outputs=1, Number of Pins=4, Number of Regulators=1, Number of Terminals=4, Output Type=Fixed, Output Voltage=3.3V, Packaging="Tape and Reel", Polarity=Positive, Power Dissipation=12W, Radiation Hardening=No, REACH SVHC="No SVHC", Termination=SMD/SMT, Weight=0.01lb, Width=3.5mm
U5: "Integrated Circuit", Manufacturer_Name="Texas Instruments", Mouser Part Number=595-ULN2003LVDR, Arrow Part Number=ULN2003LVDR, Arrow Price/Stock=https://www.arrow.com/en/products/uln2003lvdr/texas-instruments?region=nac, Datasheet Link=http://www.ti.com/lit/ds/symlink/uln2003lv.pdf, Height=1.75mm, Manufacturer_Part_Number=ULN2003LVDR, Mouser Price/Stock=https://www.mouser.co.uk/ProductDetail/Texas-Instruments/ULN2003LVDR?qs=ACPZU2kmEKPLtcExeyaSSQ%3D%3D

## Via types
v1: diameter 50, hole 28, Top Layer to Bottom Layer, 14 vias

## Nets (pads, with @x,y where several pads share a name; then routed paths per layer and width w, separated by ;. In a path a pad name is that pad's centre, name@x,y a point inside that pad or via, vN(x,y) a via of type N, cw(c..) or ccw(c..) an arc to the next point about the centre after c; other vN are vias at no path point)
+3V3: C10.1 C11.1 C12.1 C15.1 C16.1 ESP32.2 R1.1 R2.1 R3.1 R4.1 R5.1 R7.2 U4.2 U4.4 | length 6270.8
  Top Layer w10: ESP32.2 3122,2857.09 v1(3190,2789.09) ; C10.1 3992,3254.25 C11.1 4087,3254.25 4087.75,3255 C12.1 4161,3234 4161,3100 4186,3075 4267,3075 ; R7.2 4220,3218 4267,3171 4267,3075 ; R1.1 4327,3287.8 4362.6,3252.2 R2.1 4390,3126 4358,3094 ; v1(4339,3197) 4339,3120 4294,3075 ; v1(4358,3208) 4348,3198 4348.01,3197.87 4358,3094 ; 4267,3075 4294,3075 ; 4294,3075 4339,3075 4358,3094
  Bottom Layer w10: R4.1 2840,2467 2690,2617 ; v1(3190,2789.09) R3.1 ; R5.1 3385,2662.8 3380,2657.8 R3.1 ; C16.1 4281,3255 ; C15.1 3874.75,3104.25 3819,3160 3819,3293 3847,3321 ; v1(4339,3197) 4281,3255 ; v1(4358,3208) 4386,3180 U4.2 U4.4 ; 2690,2617 2667,2640 2667,2913 3075,3321 3847,3321 ; 2690,2617 2819.2,2617 2860,2657.8 R3.1 ; 3847,3321 4215,3321 4281,3255
+5V: C1.1 C9.1 C13.1 C14.1 D1.1 D2.1 D4.1 D5.1 D6.1 Re1.2 Re2.2 Re3.2 Re4.2 Re5.2 SW4.2 U4.3 U5.9 | length 8258.9
  Top Layer w10: C1.1 4371.77,2245 U5.9 4595.12,2325 D1.1@4620,2349.88 ; D4.1 4755,1977.21 SW4.2 ; Re2.2 6385,2332.76 6385,2712.24 Re3.2 6388,2804.76 6388,3163.04 Re4.2 6396,3269.04 6396,3613.24 Re5.2 ; D6.1 6779,2435.88 6779,1878.88 D2.1
  GND w10: D1.1@4620,2349.88 4685,2349.88 4690,2344.88 D4.1 ; SW4.2 5067.21,1665 Re1.2 5864.29,1829.88 D2.1 ; Re2.2 6510.12,2285 D6.1 ; Re5.2 6632.64,3490.12 D5.1
  Bottom Layer w10: U4.3 4797.04,3270.55 4806.45,3279.96 4950.59,3279.96 5006.5,3224.06 C9.1 5006.5,3155.5 5005,3154 C14.1 ; C13.1 C14.1 ; Re4.2 6329.96,3105 C14.1
BOOT: C3.1 ESP32.25 | length 600.3
  Top Layer w10: ESP32.25 3802.91,2257.09 v1(3915,2145)
  Bottom Layer w10: v1(3915,2145) 3982,2212 4002,2212 4002,2440 3981.25,2460.75 C3.1
EN: C2.1 ESP32.3 R8.2 S2.1 TP1.1 | length 4190.8
  Top Layer w10: ESP32.3 3020,2807.09 3010,2817.09 3010,3433.31 S2.1
  GND w10: S2.1 3436.1,3565 TP1.1
  Bottom Layer w10: C2.1 4364,3145 4364.6,3145.6 R8.2 4450.4,3145.6 4455,3141 4785.04,3141 4826,3100.04 4916,3100.04 4916,3259.96 4826,3259.96 4791.04,3225 4589,3225 4574,3240 4574,3334 TP1.1
GND: C1.2 C2.2 C3.2 C9.2 C10.2 C11.2 C12.2 C13.2 C14.2 C15.2 C16.2 D3.1 ESP32.1 ESP32.15 ESP32.38 ESP32.39 ESP32.40 ESP32.41 ESP32.42 ESP32.43 ESP32.44 ESP32.45 ESP32.46 ESP32.47 J1.6 S2.2 TP5.1 U2.5 U4.1 U5.8 | length 6492.6
  Top Layer w10: ESP32.1 3240,2907.09 3285.83,2861.26 ESP32.39 ; U2.5 3175,1967.56 ESP32.15 3175,2437.21 ESP32.41 ; ESP32.47 ESP32.46 ESP32.39 ; ESP32.45 ESP32.44 ESP32.43 ESP32.42 ESP32.41 ; ESP32.38 3781.09,2907.09 3999,3125 ; v1(3930,2265) 4028.49,2265 4039.99,2276.5 C1.2 4168.5,2325 U5.8 ; C12.2 4087.75,3286.5 4087,3285.75 C11.2 3992,3285.75 C10.2 3939.75,3285.75 3924,3270 3924,3200 3999,3125 ; TP5.1 4700,3000 v1(4305,3000) 4261,3044 4157.85,3044 4121.85,3080 D3.1 3999,3125 ; ESP32.41 ESP32.40 ESP32.39
  Bottom Layer w10: U2.5 3761.81,2429.25 C3.2 3970,2305 v1(3930,2265) ; C16.2 3850,3286.5 3839,3275.5 3839,3231 3934.25,3135.75 C15.2 4161,3135.75 4183.24,3113.5 C2.2 4355.5,3083 4508,3083 4514.45,3089.45 U4.1 4797.04,3089.45 4806.45,3080.04 4948.54,3080.04 C14.2 ; TP5.1 4920,2885 4973.5,2938.5 C13.2 C14.2 ; C9.2 4975,3155.5 4973.5,3154 C14.2
"IN 1": ESP32.33 U5.1 | length 501.2
  Top Layer w10: ESP32.33 3982,2657.09 3999.91,2675 U5.1
"IN 2": ESP32.31 U5.2 | length 521.9
  Top Layer w10: ESP32.31 3984.09,2557.09 4052,2625 U5.2
"IN 3": ESP32.30 U5.3 | length 521.9
  Top Layer w10: ESP32.30 3980.09,2507.09 4048,2575 U5.3
"IN 4": ESP32.28 U5.4 | length 542.6
  Top Layer w10: ESP32.28 4034.09,2407.09 4152,2525 U5.4
"IN 5": ESP32.26 U5.5 | length 563.3
  Top Layer w10: ESP32.26 3970.09,2307.09 4138,2475 U5.5
L1: P1.5 Re1.4 | length 1596
  Bottom Layer w10: P1.5 5600,1915 5600,1657 5640,1617 6379.76,1617 Re1.4
L2: P1.4 Re2.4 | length 507.8
  GND w10: P1.4 5430,2285 Re2.4
L3: P1.3 Re3.4 | length 485
  GND w10: P1.3 5594.41,2650 Re3.4
L4: P1.2 Re4.4 | length 604.9
  GND w10: P1.2 5635.04,3220.04 Re4.4
L5: P1.1 Re5.4 | length 810.3
  Top Layer w10: P1.1 5265,3210.59 Re5.4
NetD3_2: D3.2 R7.1 | length 212.8
  Top Layer w10: R7.1 4200,3296.18 4188,3284.18 4188,3174.15 4228.15,3134 D3.2
NetF2_2: F2.2 U2.1 | length 1425.9
  Layer 4 w10: v1(3904,2874) 4024.96,2753.04 U2.1
  Bottom Layer w10: F2.2 3848,2930 v1(3904,2874)
NetSW4_1: SW4.1 U2.6 | length 1668.6
  Top Layer w10: U2.6 3216.08,1769 4475.69,1769 SW4.1
NEUTRAL: J2.1 U2.2 | length 1467.3
  Layer 4 w10: J2.1 3204,2176 3596.48,2176 U2.2
"OUT 1": D4.2 Re1.1 U5.16 | length 1609.2
  Top Layer w10: U5.16 4523,2675 4547,2699 4701.12,2699 D4.2
  GND w10: D4.2 5550.08,1850.04 Re1.1
"OUT 2": D1.2 Re2.1 U5.15 | length 2263.1
  Top Layer w10: U5.15 4594.88,2625 D1.2@4620,2650.12
  Bottom Layer w10: D1.2@4620,2650.12 4672.88,2703 5092,2703 5695.04,2099.96 Re2.1
"OUT 3": D2.2 Re3.1 U5.14 | length 2902
  Top Layer w10: v1(4378,2617) 4420,2575 U5.14 ; Re3.1 6730,2277.72 D2.2
  GND w10: v1(4378,2617) 4527,2766 5374.76,2766 5431.76,2823 6184.72,2823 Re3.1
"OUT 4": D5.2 Re4.1 U5.13 | length 2760
  Top Layer w10: U5.13 4743,2525 4794,2576 4794,2760 v1(4738,2816)
  GND w10: v1(4738,2816) 4758,2796 5354,2796 5593,3035 Re4.1 6599.88,3189.88 D5.2
"OUT 5": D6.2 Re5.1 U5.12 | length 3724.6
  Top Layer w10: U5.12 4802,2475 5406,3079 5406,3227 5920,3741 6480,3741 6501,3720 6501,3533.2 Re5.1 6570,3367.72 6570,2945.12 D6.2
PHASE: F2.1 J2.2 Re1.3 Re2.3 Re3.3 Re4.3 Re5.3 | length 5539.3
  Top Layer w10: Re5.3 6000,3452.76 Re4.3 5992.24,3002.24 Re3.3 Re2.3 5980,1837.17 Re1.3
  Bottom Layer w10: J2.2 2780,2930 F2.1 3269.61,2817 3319.61,2767 5488,2767 5529,2808 5932,2808 Re3.3
RX: ESP32.34 TP2.1 | length 583
  Top Layer w10: ESP32.34 4097.09,2707.09 TP2.1
"SW 1": ESP32.9 J1.1 R1.2 | length 2891.5
  Top Layer w10: v1(2987,3611) 2987,2540 3019.91,2507.09 ESP32.9 ; J1.1 4262,3507.72 4262,3270 4279.8,3252.2 R1.2
  GND w10: v1(2987,3611) 3153,3777 3992.72,3777 J1.1
"SW 2": ESP32.10 J1.2 R2.2 | length 3132.6
  Top Layer w10: ESP32.10 3011,2457.09 2947,2521.09 2947,3735 3000,3788 4080.15,3788 J1.2 4390,3478.15 R2.2
"SW 3": ESP32.11 J1.3 R3.2 | length 3183.8
  Top Layer w10: v1(3137,2535) 3137,2454.09 3090,2407.09 ESP32.11 2999.91,2407.09 2927,2480 2927,3760 2984,3817 4149.57,3817 J1.3
  Bottom Layer w10: v1(3137,2535) 3190,2588 R3.2
"SW 4": ESP32.12 J1.4 R4.2 | length 3050.1
  Top Layer w10: v1(2958,2357.09) ESP32.12
  Bottom Layer w10: v1(2958,2357.09) 2915.09,2400 R4.2 2687,2400 2647,2440 2647,3037 3122,3512 4237,3512 J1.4
"SW 5": ESP32.13 J1.5 R5.2 | length 3854
  Top Layer w10: ESP32.13 v1(3130.51,2307.09)
  Layer 4 w10: v1(3130.51,2307.09) J1.5 4493.42,2814.42 v1(4379,2700)
  Bottom Layer w10: R5.2 4306.2,2627.2 v1(4379,2700)
TX: ESP32.35 TP4.1 | length 321.8
  Top Layer w10: ESP32.35 3780,2757.09 3790,2767.09 3790,2820 TP4.1
pads on no net: ESP32.4 ESP32.5 ESP32.6 ESP32.7 ESP32.8 ESP32.14 ESP32.16 ESP32.17 ESP32.18 ESP32.19 ESP32.20 ESP32.21 ESP32.22 ESP32.23 ESP32.24 ESP32.27 ESP32.29 ESP32.32 ESP32.36 ESP32.37 R8.1 U2.3 U2.4 U5.6 U5.7 U5.10 U5.11

## Polygon pours and split planes (outlines as drawn)
GND on GND "GND_L02_P000" (solid, pour order 0): 2490,3980 6850,3980 6850,1345 6860,1335 2475,1335 2470,1340 2470,3985
+5V on 5V (split plane): 6874.9,1330.1 2480.1,1330.1 2480.1,3979.9 6874.9,3979.9
+3V3 on 3.3V (split plane): 6874.9,1330.1 2480.1,1330.1 2480.1,3979.9 6874.9,3979.9

## Other copper
Top Layer:
  text "Smart Home Automation" at 5595,1450 h60